# EAGLE board CT_schematic (EAGLE 7.6.0)

Size 100 x 80 mm. Coordinates in mm from the lower left corner, seen from the top.
Outline: 0,0 100,0 100,80 0,80 0,0
Copper layers (1*16): Top 0.035mm / dielectric 1.5mm / Bottom 0.035mm
Design rules "default": minimum track width 10mil, minimum drill 24mil, track to track 8mil, track to pad 8mil, pad to pad 8mil, via to via 8mil, smd to smd 8mil, copper to edge 40mil, drill to drill 8mil, minimum pad ring 10mil, minimum via ring 8mil, stop-mask expansion 4mil, vias tented up to drill 0mil, thermal gap 10mil

## Footprints (pad centres in the part's own frame; a part is rotated, then mirrored left to right if it is on the bottom)
C0603 = smd 0.8 x 0.8: 1 -0.762,0; 2 0.762,0
C0402 = smd 0.5 x 0.5: 1 -0.508,0; 2 0.508,0
EXV-9B = smd 2.718 x 1.778: 1 -2.108,0; 2 2.108,0
EXV-9H = smd 3.505 x 1.676: 1 -2.857,0; 2 2.857,0
PJ-037B_PACKAGE = drill 3.7 square: 1 12,0 | drill 3.2 square: 2 6,0
R0603 = smd 0.8 x 0.8: 1 -0.762,0; 2 0.762,0
UFBGA132 = smd 0.32 x 0.32: A1 -2.75,2.75; A2 -2.25,2.75; A3 -1.75,2.75; A4 -1.25,2.75; A5 -0.75,2.75; A6 -0.25,2.75; A7 0.25,2.75; A8 0.75,2.75; A9 1.25,2.75; A10 1.75,2.75; A11 2.25,2.75; A12 2.75,2.75; B1 -2.75,2.25; B2 -2.25,2.25; B3 -1.75,2.25; B4 -1.25,2.25; B5 -0.75,2.25; B6 -0.25,2.25; B7 0.25,2.25; B8 0.75,2.25; B9 1.25,2.25; B10 1.75,2.25; B11 2.25,2.25; B12 2.75,2.25; C1 -2.75,1.75; C2 -2.25,1.75; C3 -1.75,1.75; C4 -1.25,1.75; C5 -0.75,1.75; C6 -0.25,1.75; C7 0.25,1.75; C8 0.75,1.75; C9 1.25,1.75; C10 1.75,1.75; C11 2.25,1.75; C12 2.75,1.75; D1 -2.75,1.25; D2 -2.25,1.25; D3 -1.75,1.25; D4 -1.25,1.25; D5 -0.75,1.25; D6 -0.25,1.25; D7 0.25,1.25; D8 0.75,1.25; D9 1.25,1.25; D10 1.75,1.25; D11 2.25,1.25; D12 2.75,1.25; E1 -2.75,0.75; E2 -2.25,0.75; E3 -1.75,0.75; E4 -1.25,0.75; E9 1.25,0.75; E10 1.75,0.75; E11 2.25,0.75; E12 2.75,0.75; F1 -2.75,0.25; F2 -2.25,0.25; F3 -1.75,0.25; F4 -1.25,0.25; F6 -0.25,0.25; F7 0.25,0.25; F9 1.25,0.25; F10 1.75,0.25; F11 2.25,0.25; F12 2.75,0.25; G1 -2.75,-0.25; G2 -2.25,-0.25; G3 -1.75,-0.25; G4 -1.25,-0.25; G6 -0.25,-0.25; G7 0.25,-0.25; G9 1.25,-0.25; G10 1.75,-0.25; G11 2.25,-0.25; G12 2.75,-0.25; H1 -2.75,-0.75; H2 -2.25,-0.75; H3 -1.75,-0.75; H4 -1.25,-0.75; H9 1.25,-0.75; H10 1.75,-0.75; H11 2.25,-0.75; H12 2.75,-0.75; J1 -2.75,-1.25; J2 -2.25,-1.25; J3 -1.75,-1.25; J4 -1.25,-1.25; J5 -0.75,-1.25; J6 -0.25,-1.25; J7 0.25,-1.25; J8 0.75,-1.25; J9 1.25,-1.25; J10 1.75,-1.25; J11 2.25,-1.25; J12 2.75,-1.25; K1 -2.75,-1.75; K2 -2.25,-1.75; K3 -1.75,-1.75; K4 -1.25,-1.75; K5 -0.75,-1.75; K6 -0.25,-1.75; K7 0.25,-1.75; K8 0.75,-1.75; K9 1.25,-1.75; K10 1.75,-1.75; K11 2.25,-1.75; K12 2.75,-1.75; L1 -2.75,-2.25; L2 -2.25,-2.25; L3 -1.75,-2.25; L4 -1.25,-2.25; L5 -0.75,-2.25; L6 -0.25,-2.25; L7 0.25,-2.25; L8 0.75,-2.25; L9 1.25,-2.25; L10 1.75,-2.25; L11 2.25,-2.25; L12 2.75,-2.25; M1 -2.75,-2.75; M2 -2.25,-2.75; M3 -1.75,-2.75; M4 -1.25,-2.75; M5 -0.75,-2.75; M6 -0.25,-2.75; M7 0.25,-2.75; M8 0.75,-2.75; M9 1.25,-2.75; M10 1.75,-2.75; M11 2.25,-2.75; M12 2.75,-2.75
SOIC-8 = smd 1.6 x 0.6: 1 -2.7,1.905 | smd 1.55 x 0.6: 2 -2.7,0.635; 3 -2.7,-0.635; 4 -2.7,-1.905; 5 2.7,-1.905; 6 2.7,-0.635; 7 2.7,0.635; 8 2.7,1.905
ABS07-32.768KHZ-7-T = smd 1.1 x 2.4: 1 -2.5,0; 2 0,0
ASFL1 = smd 1.7 x 1.5: 1 -1.27,-1.1; 2 1.27,-1.1; 3 1.27,1.1; 4 -1.27,1.1
LP2954 = smd 1.6 x 0.6: 1 -2.475,1.905 | smd 1.55 x 0.6: 2 -2.475,0.635; 3 -2.475,-0.635; 4 -2.475,-1.905; 5 2.475,-1.905; 6 2.475,-0.635; 7 2.475,0.635; 8 2.475,1.905
SON-6 = smd 0.55 x 0.3: 1 -0.355,0.5 | smd 0.52 x 0.3: 2 -0.37,0; 3 -0.37,-0.5; 4 0.37,-0.5; 5 0.37,0; 6 0.37,0.5
SW_4-1437565-2 = smd 1.4 x 2.1: 1 -2.23,4.55; 2 -2.23,-4.55; 3 2.23,4.55; 4 2.23,-4.55
LGM67K-G1J2-24-Z = smd 0.8 x 1.4: A -2,0; C 0,0
NC7SZ125M5X = smd 1.3 x 0.7: 1 -1.3,0.95; 2 -1.3,0; 3 -1.3,-0.95; 4 1.3,-0.95; 5 1.3,0.95

## Placement (x,y rotation side)
C1  1e-06  [C0603]  -48.26,52.07 0 top  (outside the outline)
C2  1e-07  [C0603]  -52.07,52.07 0 top  (outside the outline)
C3  1e-07  [C0603]  -55.88,52.07 0 top  (outside the outline)
C4  1e-07  [C0603]  -15.24,57.15 0 top  (outside the outline)
C5  1e-07  [C0603]  -19.05,57.15 0 top  (outside the outline)
C6  1e-07  [C0603]  -22.86,57.15 0 top  (outside the outline)
C7  1e-07  [C0603]  -26.67,57.15 0 top  (outside the outline)
C8  1e-07  [C0603]  -30.48,57.15 0 top  (outside the outline)
C9  1e-07  [C0603]  -34.29,57.15 0 top  (outside the outline)
C10  4.7e-06  [C0603]  -44.45,52.07 0 top  (outside the outline)
C11  1e-07  [C0603]  -38.1,57.15 0 top  (outside the outline)
C12  1e-07  [C0603]  -41.91,57.15 0 top  (outside the outline)
C13  1e-07  [C0603]  -45.72,57.15 0 top  (outside the outline)
C14  1e-08  [C0603]  -49.53,57.15 0 top  (outside the outline)
C15  1e-06  [C0603]  -53.34,57.15 0 top  (outside the outline)
C16  1e-11  [C0402]  -22.86,62.23 0 top  (outside the outline)
C17  1e-11  [C0402]  -26.67,62.23 0 top  (outside the outline)
C18  1e-08  [C0402]  -30.48,62.23 0 top  (outside the outline)
C19  1e-08  [C0402]  -34.29,62.23 0 top  (outside the outline)
C20  1e-06  [EXV-9B]  -49.53,38.1 0 top  (outside the outline)
C21  2.2e-06  [EXV-9B]  -16.51,45.72 0 top  (outside the outline)
C22  1e-07  [C0402]  -38.1,62.23 0 top  (outside the outline)
C23  0.0001  [EXV-9H]  -35.56,30.48 0 top  (outside the outline)
C24  0.0001  [EXV-9H]  -46.99,30.48 0 top  (outside the outline)
C25  1e-08  [C0402]  -41.91,62.23 0 top  (outside the outline)
J1  PJ-037B  [PJ-037B_PACKAGE]  -27.94,7.62 0 top  (outside the outline)
R2  1000.0  [R0603]  -57.15,57.15 0 top  (outside the outline)
R4  4700.0  [R0603]  -15.24,62.23 0 top  (outside the outline)
R5  10000.0  [R0603]  -15.24,52.07 0 top  (outside the outline)
R6  10000.0  [R0603]  -20.32,52.07 0 top  (outside the outline)
R7  10000.0  [R0603]  -25.4,52.07 0 top  (outside the outline)
R8  10000.0  [R0603]  -30.48,52.07 0 top  (outside the outline)
R9  100000.0  [R0603]  -36.83,45.72 0 top  (outside the outline)
R10  100000.0  [R0603]  -41.91,45.72 0 top  (outside the outline)
R11  164658.62  [R0603]  -31.75,45.72 0 top  (outside the outline)
R12  100000.0  [R0603]  -46.99,45.72 0 top  (outside the outline)
R13  10000.0  [R0603]  -35.56,52.07 0 top  (outside the outline)
R14  10000.0  [R0603]  -40.64,52.07 0 top  (outside the outline)
R15  9100.0  [R0603]  -19.05,62.23 0 top  (outside the outline)
R16  680000.0  [R0603]  -52.07,45.72 0 top  (outside the outline)
R17  120000.0  [R0603]  -57.15,45.72 0 top  (outside the outline)
U1  STM32L476QEI6  [UFBGA132]  -24.13,20.32 0 top  (outside the outline)
U2  AT25010B-SSHL-T  [SOIC-8]  -57.15,19.05 0 top  (outside the outline)
U3  ABS07-32.768KHZ-7-T  [ABS07-32.768KHZ-7-T]  -27.94,39.37 0 top  (outside the outline)
U4  ASFL1-25MHZ-NCS  [ASFL1]  -26.67,30.48 0 top  (outside the outline)
U5  LP2954AIMX/NOPB  [LP2954]  -40.64,19.05 0 top  (outside the outline)
U6  TPS3895ADRYR  [SON-6]  -44.45,60.96 0 top  (outside the outline)
U7  4-1437565-2  [SW_4-1437565-2]  -44.45,6.35 0 top  (outside the outline)
U8  Q65110A2395  [LGM67K-G1J2-24-Z]  -36.83,38.1 0 top  (outside the outline)
U9  nc7sz125m5x  [NC7SZ125M5X]  -24.13,45.72 0 top  (outside the outline)

## Library data of the parts
C1-C25 J1 R2 R4-R17 U1-U9 = circuit_tree

## Nets
CLK_CRYSTAL_U1_D1: C16.1 U1.D1 U3.1
CLK_CRYSTAL_U1_E1: C17.1 U1.E1 U3.2
CLK_U1_F1: U1.F1 U4.3
GND: C1.2 C2.2 C3.2 C4.2 C5.2 C6.2 C7.2 C8.2 C9.2 C10.2 C11.2 C12.2 C13.2 C14.2 C15.2 C16.2 C17.2 C18.2 C19.2 C20.2 C21.2 C22.2 C23.2 C24.2 C25.2 J1.2 R2.2 R5.2 R12.2 R15.2 R17.2 U1.D3 U1.E3 U1.F2 U1.F6 U1.F7 U1.F11 U1.F12 U1.J1 U2.4 U4.2 U5.4 U6.2 U8.C U9.1 U9.3
NET_U1_A4: R5.1 U1.A4
NET_U1_H2: R4.1 U1.H2 U9.4
NET_U1_M11: U8.A
NET_U1_M12: U7.3 U7.4
NET_U2_3: R6.1 U2.3
NET_U2_7: R8.1 U2.7
NET_U5_3: R10.1 U5.3
NET_U5_5: R9.1 U5.5
NET_U5_7: R11.2 R12.1 U5.7
NET_U6_1: R14.1 R15.1 U6.1
NET_U6_3: R16.2 R17.1 U6.3
NET_U6_4: R13.1 U6.4 U9.2
NET_U7_1: R2.1 U7.1 U7.2
PROC_SPI1_MISO: U1.A7 U2.2
PROC_SPI1_MOSI: U1.C5 U2.5
PROC_SPI1_NSS: R7.1 U1.A9 U2.1
PROC_SPI1_SCK: U1.A8 U2.6
VCC_S1_9V9: C20.1 C23.1 C24.1 J1.1 R10.2 U5.8
VCC_TIER1_3V3: C1.1 C2.1 C3.1 C4.1 C5.1 C6.1 C7.1 C8.1 C9.1 C10.1 C11.1 C12.1 C13.1 C14.1 C15.1 C18.1 C19.1 C21.1 C22.1 C25.1 R4.2 R6.2 R7.2 R8.2 R9.2 R11.1 R13.2 R14.2 R16.1 U1.C4 U1.C11 U1.E2 U1.G2 U1.G6 U1.G7 U1.G11 U1.G12 U1.H3 U1.L1 U1.M1 U2.8 U4.4 U5.1 U6.6 U9.5

## Tracks (layer width: path | path; a pad name or v marks a point on that pad's centre or on a via)
CLK_CRYSTAL_U1_D1  (2 unrouted)
CLK_CRYSTAL_U1_E1  (2 unrouted)
CLK_U1_F1  (1 unrouted)
GND  (45 unrouted)
NET_U1_A4  (1 unrouted)
NET_U1_H2  (2 unrouted)
NET_U1_M12  (1 unrouted)
NET_U2_3  (1 unrouted)
NET_U2_7  (1 unrouted)
NET_U5_3  (1 unrouted)
NET_U5_5  (1 unrouted)
NET_U5_7  (2 unrouted)
NET_U6_1  (2 unrouted)
NET_U6_3  (2 unrouted)
NET_U6_4  (2 unrouted)
NET_U7_1  (2 unrouted)
PROC_SPI1_MISO  (1 unrouted)
PROC_SPI1_MOSI  (1 unrouted)
PROC_SPI1_NSS  (2 unrouted)
PROC_SPI1_SCK  (1 unrouted)
VCC_S1_9V9  (5 unrouted)
VCC_TIER1_3V3  (44 unrouted)